# EAGLE board BluePillF4 Teardrops Panel (EAGLE 7.7.0), part 1 of 4
AUTHOR: www.stm32duino.com; REV: A
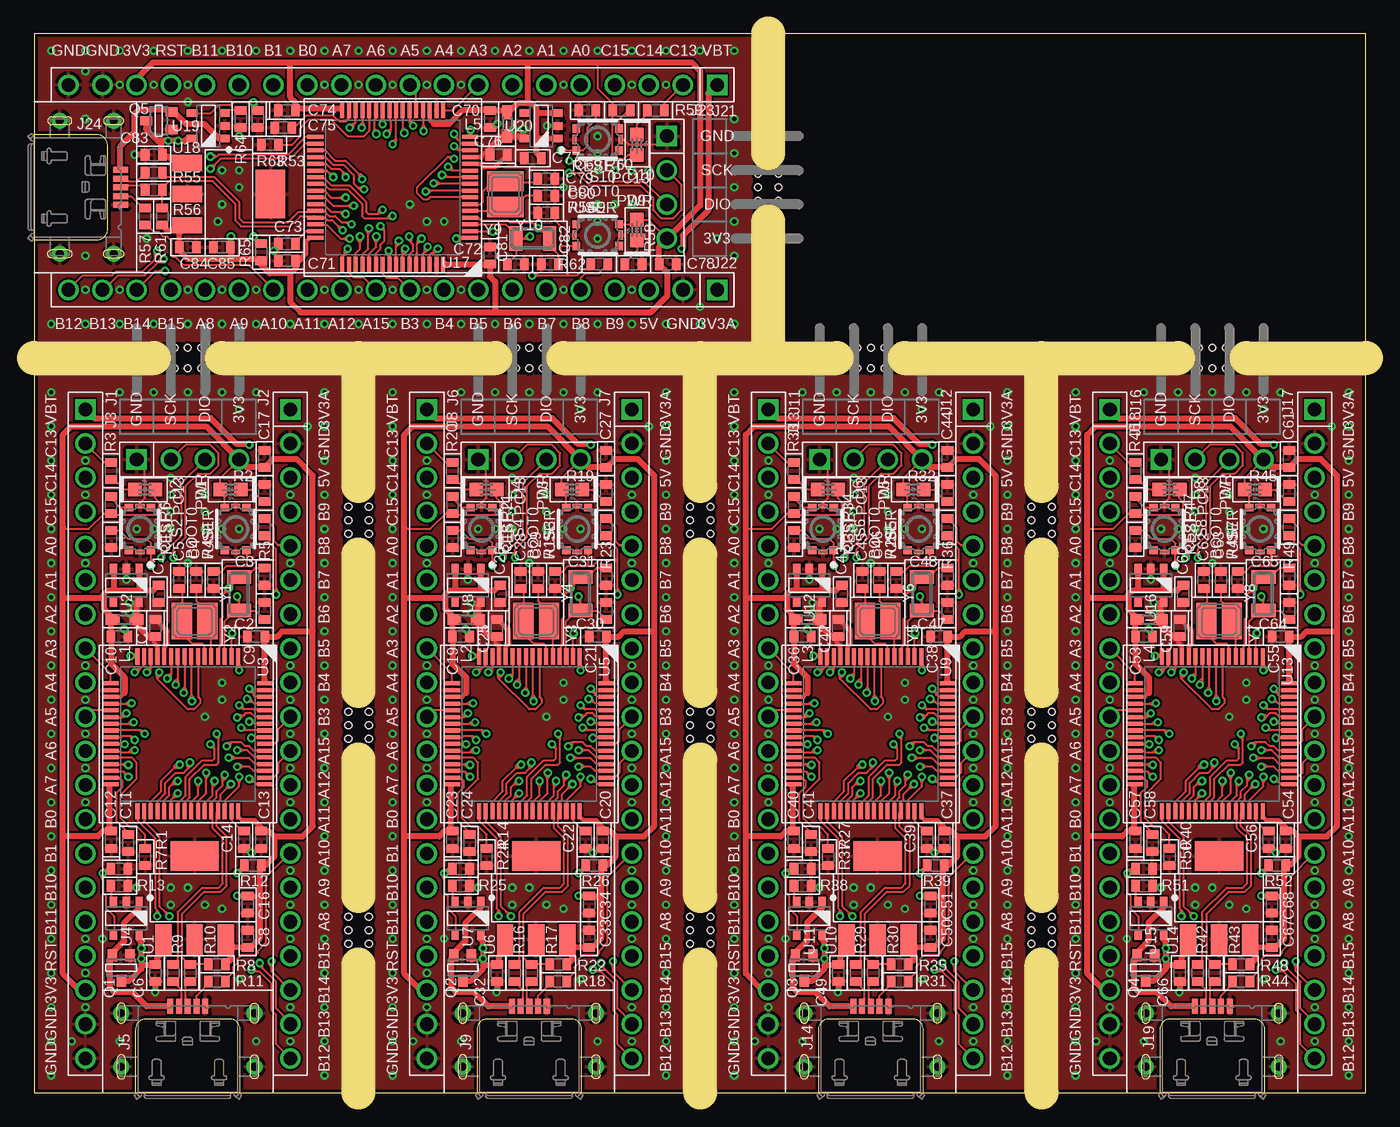
[diagram p0: board, top side]
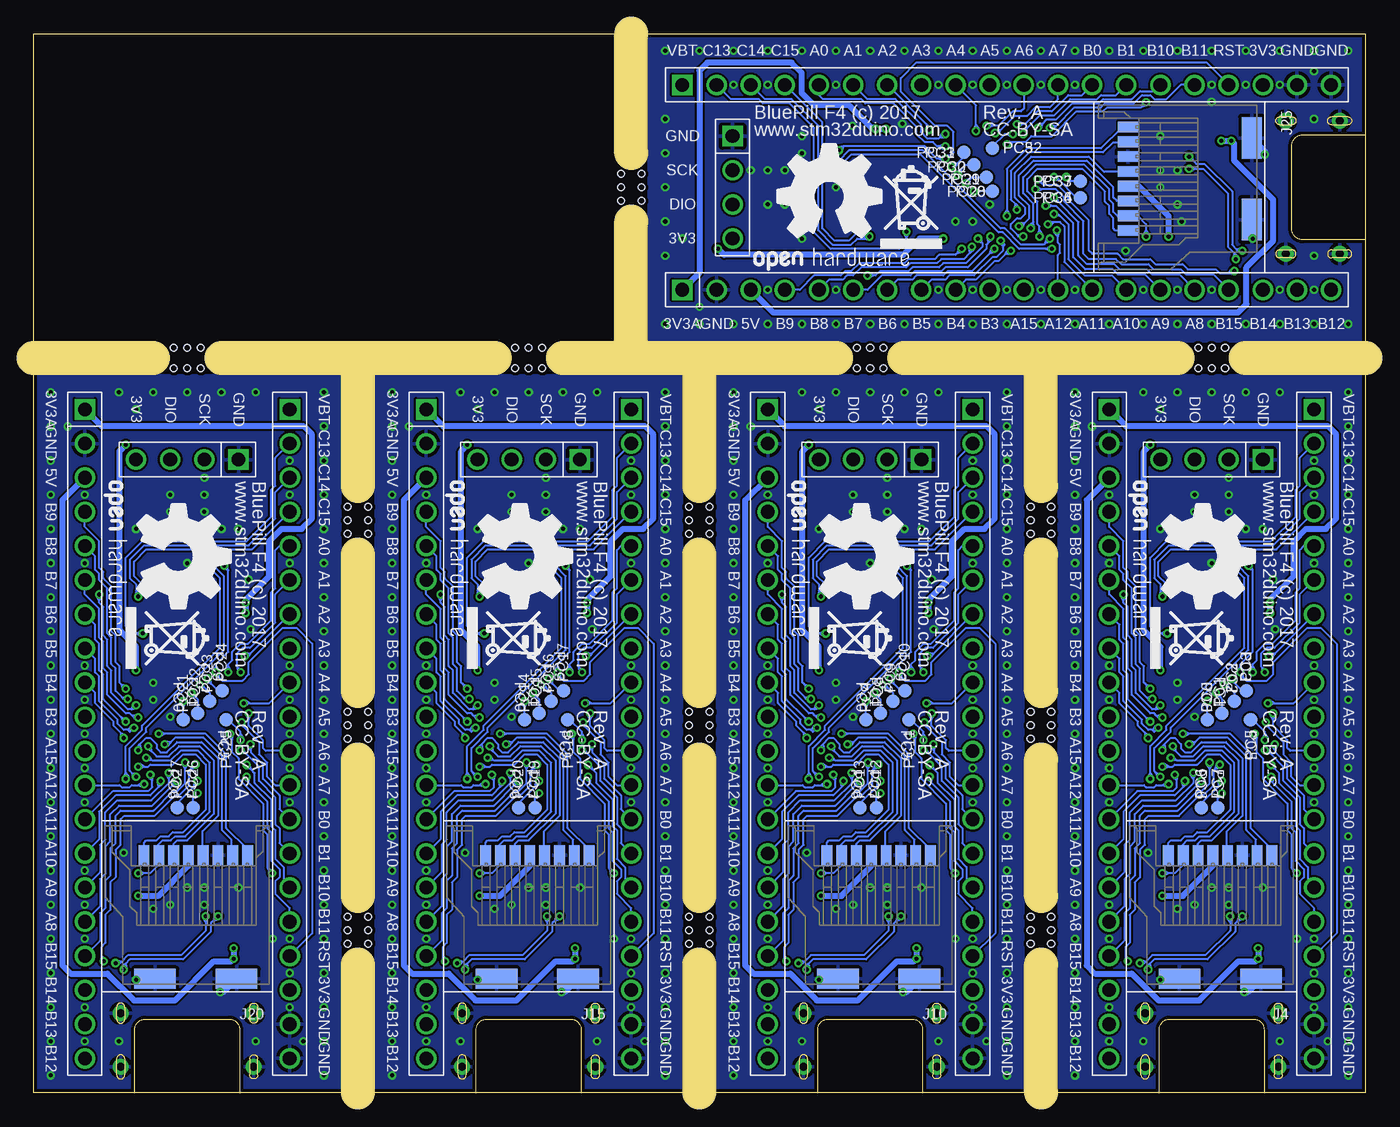
[diagram p1: board, bottom side, seen from below]

Size 99.11 x 78.78 mm. Coordinates in mm from the lower left corner, seen from the top.
Outline: 25.45,0.04 48.3,0.04
Outline: 50.84,0.04 73.7,0.04
Outline: 0.04,78.78 0.04,0.04 99.11,0.04 99.11,78.78 0.04,78.78
Copper layers (1*16): Top 0.035mm / dielectric 1.5mm / Bottom 0.035mm
Design rules "SeeedStudio_2layer_DRU_no_angle_20140221 *": minimum track width 6mil, minimum drill 12mil, track to track 6mil, track to pad 6mil, pad to pad 6mil, via to via 6mil, smd to smd 0mil, copper to edge 10mil, drill to drill 10mil, minimum pad ring 10mil, minimum via ring 6mil, stop-mask expansion 2mil, vias tented up to drill 100mil, thermal gap 10mil
Holes 0.5 mm at 11.47,53.89 12.47,53.89 10.47,53.89 10.47,55.42 11.47,55.42 12.47,55.42 36.88,53.89 37.88,53.89 35.88,53.89 35.88,55.42 36.88,55.42 37.88,55.42 62.27,53.89 63.27,53.89 61.27,53.89 61.27,55.42 62.27,55.42 63.27,55.42 87.67,53.89 88.67,53.89 86.67,53.89 86.67,55.42 87.67,55.42 88.67,55.42 24.94,42.59 24.94,43.59 24.94,41.59 23.41,41.59 23.41,42.59 23.41,43.59 50.34,42.59 50.34,43.59 50.34,41.59 48.81,41.59 48.81,42.59 48.81,43.59 75.74,42.59 75.74,43.59 75.74,41.59 74.21,41.59 74.21,42.59 74.21,43.59 24.94,27.35 24.94,28.35 24.94,26.35 23.41,26.35 23.41,27.35 23.41,28.35 24.94,12.11 24.94,13.11 24.94,11.11 23.41,11.11 23.41,12.11 23.41,13.11 50.34,27.35 50.34,28.35 50.34,26.35 48.81,26.35 48.81,27.35 48.81,28.35 50.34,12.11 50.34,13.11 50.34,11.11 48.81,11.11 48.81,12.11 48.81,13.11 75.74,27.35 75.74,28.35 75.74,26.35 74.21,26.35 74.21,27.35 74.21,28.35 75.74,12.11 75.74,13.11 75.74,11.11 74.21,11.11 74.21,12.11 74.21,13.11 55.42,67.36 55.42,68.36 55.42,66.36 53.89,66.36 53.89,67.36 53.89,68.36
Milling: 23 lines

## Footprints (pad centres in the part's own frame; a part is rotated, then mirrored left to right if it is on the bottom)
C0603 = smd 0.635 x 0.889: 1 -0.635,0; 2 0.635,0
LED0603 = smd 1.016 x 1.016: 1 -0.762,0; 2 0.762,0
MH20-1-0.1 = drill 1.016 square: 1 0,0 | drill 1.016: 2 2.54,0; 3 5.08,0; 4 7.62,0; 5 10.16,0; 6 12.7,0; 7 15.24,0; 8 17.78,0; 9 20.32,0; 10 22.86,0; 11 25.4,0; 12 27.94,0; 13 30.48,0; 14 33.02,0; 15 35.56,0; 16 38.1,0; 17 40.64,0; 18 43.18,0; 19 45.72,0; 20 48.26,0
MH_RA4-1-0.1 = drill 1.016 square: 1 -3.81,-3.81 | drill 1.016: 2 -1.27,-3.81; 3 1.27,-3.81; 4 3.81,-3.81
MR07C-06200 = smd 3.1 x 1.5: G1 3.03,9.2; G2 -3.03,9.2 | smd 0.8 x 1.5: P1 3.85,0; P2 2.75,0; P3 1.65,0; P4 0.55,0; P5 -0.55,0; P6 -1.65,0; P7 -2.75,0; P8 -3.85,0
47662-001 = smd 0.45 x 1.1: 1 -1.3,4.52; 2 -0.65,4.52; 3 0,4.52; 4 0.65,4.52; 5 1.3,4.52 | drill 0.6 pad 1.2: S$1 -4.95,0; S$2 4.95,0; S$3 -4.95,4; S$4 4.95,4
FB0603 = smd 1.016 x 0.762: 1 -0.889,0; 2 0.889,0
TEST_PAD = smd 1 x 1: 1 0,0
SOT323 = smd 0.7 x 0.9: 1 -0.65,-0.95; 2 0.65,-0.95; 3 0,0.95
R0603 = smd 0.635 x 0.889: 1 -0.635,0; 2 0.635,0
SKSGACE010 = smd 0.575 x 0.625: 1 -1.587,0.812; 2 -1.587,-0.812; 3 1.587,0.812; 4 1.587,-0.812 | smd 0.325 x 0.699: 5 -1.712,0; 6 1.712,0
SOT223 = smd 1.219 x 2.235: 1 -2.311,-3.099; 2 0,-3.099; 3 2.311,-3.099 | smd 3.6 x 2.2: PAD 0,3.099
SOT23-5 = smd 0.55 x 0.8: 1 -0.95,-1.2; 2 0,-1.2; 3 0.95,-1.2; 4 0.95,1.2; 5 -0.95,1.2
LQFP64 = smd 1.2 x 0.3: 1 -5.75,3.75; 2 -5.75,3.25; 3 -5.75,2.75; 4 -5.75,2.25; 5 -5.75,1.75; 6 -5.75,1.25; 7 -5.75,0.75; 8 -5.75,0.25; 9 -5.75,-0.25; 10 -5.75,-0.75; 11 -5.75,-1.25; 12 -5.75,-1.75; 13 -5.75,-2.25; 14 -5.75,-2.75; 15 -5.75,-3.25; 16 -5.75,-3.75; 33 5.75,-3.75; 34 5.75,-3.25; 35 5.75,-2.75; 36 5.75,-2.25; 37 5.75,-1.75; 38 5.75,-1.25; 39 5.75,-0.75; 40 5.75,-0.25; 41 5.75,0.25; 42 5.75,0.75; 43 5.75,1.25; 44 5.75,1.75; 45 5.75,2.25; 46 5.75,2.75; 47 5.75,3.25; 48 5.75,3.75 | smd 0.3 x 1.2: 17 -3.75,-5.75; 18 -3.25,-5.75; 19 -2.75,-5.75; 20 -2.25,-5.75; 21 -1.75,-5.75; 22 -1.25,-5.75; 23 -0.75,-5.75; 24 -0.25,-5.75; 25 0.25,-5.75; 26 0.75,-5.75; 27 1.25,-5.75; 28 1.75,-5.75; 29 2.25,-5.75; 30 2.75,-5.75; 31 3.25,-5.75; 32 3.75,-5.75; 49 3.75,5.75; 50 3.25,5.75; 51 2.75,5.75; 52 2.25,5.75; 53 1.75,5.75; 54 1.25,5.75; 55 0.75,5.75; 56 0.25,5.75; 57 -0.25,5.75; 58 -0.75,5.75; 59 -1.25,5.75; 60 -1.75,5.75; 61 -2.25,5.75; 62 -2.75,5.75; 63 -3.25,5.75; 64 -3.75,5.75
CRYSTAL_32X15 = smd 1 x 1.8: 1 -1.25,0; 2 1.25,0
CRYSTAL_32X25_2P = smd 1.5 x 2.7: 1 -0.95,0; 2 0.95,0

## Placement (x,y rotation side)
C1  10u  [C0603]  9.32,37.13 270 top
C2  6p8  [C0603]  17.19,35.86 90 top
C3  6p8  [C0603]  17.19,38.4 270 top
C4  20p  [C0603]  12.11,38.15 90 top
C5  20p  [C0603]  10.84,38.15 90 top
C6  4u7  [C0603]  9.06,8.94 270 top
C7  100n  [C0603]  9.06,34.59 270 top
C8  4u7  [C0603]  15.92,11.47 90 top
C9  100n  [C0603]  16.55,33.95 0 top
C10  100n  [C0603]  6.39,33.95 180 top
C11  2u2  [C0603]  7.03,18.59 90 top
C12  100n  [C0603]  5.76,18.84 270 top
C13  100n  [C0603]  16.94,18.84 270 top
C14  2u2  [C0603]  15.67,18.84 90 top
C15  100n  [C0603]  5.76,41.19 90 top
C16  4u7  [C0603]  15.92,14.02 90 top
C17  100n  [C0603]  17.19,47.16 270 top
C18  100n  [C0603]  31.16,41.19 90 top
C19  100n  [C0603]  31.8,33.95 180 top
C20  100n  [C0603]  42.34,18.84 270 top
C21  100n  [C0603]  41.95,33.95 0 top
C22  2u2  [C0603]  41.07,18.84 90 top
C23  100n  [C0603]  31.16,18.84 270 top
C24  2u2  [C0603]  32.43,18.59 90 top
C25  100n  [C0603]  34.46,34.59 270 top
C26  10u  [C0603]  34.72,37.13 270 top
C27  100n  [C0603]  42.59,47.16 270 top
C28  20p  [C0603]  36.24,38.15 90 top
C29  20p  [C0603]  37.51,38.15 90 top
C30  6p8  [C0603]  42.59,35.86 90 top
C31  6p8  [C0603]  42.59,38.4 270 top
C32  4u7  [C0603]  34.46,8.94 270 top
C33  4u7  [C0603]  41.32,11.47 90 top
C34  4u7  [C0603]  41.32,14.02 90 top
C35  100n  [C0603]  56.56,41.19 90 top
C36  100n  [C0603]  57.2,33.95 180 top
C37  100n  [C0603]  67.74,18.84 270 top
C38  100n  [C0603]  67.36,33.95 0 top
C39  2u2  [C0603]  66.47,18.84 90 top
C40  100n  [C0603]  56.56,18.84 270 top
C41  2u2  [C0603]  57.83,18.59 90 top
C42  100n  [C0603]  59.86,34.59 270 top
C43  10u  [C0603]  60.12,37.13 270 top
C44  100n  [C0603]  67.99,47.16 270 top
C45  20p  [C0603]  61.64,38.15 90 top
C46  20p  [C0603]  62.91,38.15 90 top
C47  6p8  [C0603]  67.99,35.86 90 top
C48  6p8  [C0603]  67.99,38.4 270 top
C49  4u7  [C0603]  59.86,8.94 270 top
C50  4u7  [C0603]  66.72,11.47 90 top
C51  4u7  [C0603]  66.72,14.02 90 top
C52  100n  [C0603]  81.96,41.19 90 top
C53  100n  [C0603]  82.59,33.95 180 top
C54  100n  [C0603]  93.14,18.84 270 top
C55  100n  [C0603]  92.75,33.95 0 top
C56  2u2  [C0603]  91.87,18.84 90 top
C57  100n  [C0603]  81.96,18.84 270 top
C58  2u2  [C0603]  83.23,18.59 90 top
C59  100n  [C0603]  85.26,34.59 270 top
C60  10u  [C0603]  85.52,37.13 270 top
C61  100n  [C0603]  93.39,47.16 270 top
C62  20p  [C0603]  87.04,38.15 90 top
C63  20p  [C0603]  88.31,38.15 90 top
C64  6p8  [C0603]  93.39,35.86 90 top
C65  6p8  [C0603]  93.39,38.4 270 top
C66  4u7  [C0603]  85.26,8.94 270 top
C67  4u7  [C0603]  92.12,11.47 90 top
C68  4u7  [C0603]  92.12,14.02 90 top
C69  100n  [C0603]  41.19,73.07 0 top
C70  100n  [C0603]  33.95,72.44 90 top
C71  100n  [C0603]  18.84,61.89 180 top
C72  100n  [C0603]  33.95,62.27 270 top
C73  2u2  [C0603]  18.84,63.16 0 top
C74  100n  [C0603]  18.84,73.07 180 top
C75  2u2  [C0603]  18.59,71.8 0 top
C76  100n  [C0603]  34.59,69.77 180 top
C77  10u  [C0603]  37.13,69.51 180 top
C78  100n  [C0603]  47.16,61.64 180 top
C79  20p  [C0603]  38.15,67.99 0 top
C80  20p  [C0603]  38.15,66.72 0 top
C81  6p8  [C0603]  35.86,61.64 0 top
C82  6p8  [C0603]  38.4,61.64 180 top
C83  4u7  [C0603]  8.94,69.77 180 top
C84  4u7  [C0603]  11.47,62.91 0 top
C85  4u7  [C0603]  14.02,62.91 0 top
D1  GREEN  [LED0603]  14.65,44.88 180 top
D2  RED  [LED0603]  8.3,44.88 0 top
D3  GREEN  [LED0603]  40.05,44.88 180 top
D4  RED  [LED0603]  33.7,44.88 0 top
D5  GREEN  [LED0603]  65.45,44.88 180 top
D6  RED  [LED0603]  59.1,44.88 0 top
D7  GREEN  [LED0603]  90.85,44.88 180 top
D8  RED  [LED0603]  84.5,44.88 0 top
D9  GREEN  [LED0603]  44.88,64.18 90 top
D10  RED  [LED0603]  44.88,70.53 270 top
DRILEGEND  [DRILEGEND]  127.3,59.99 0 top  (outside the outline)
J1  MH20-1  [MH20-1-0.1]  3.85,50.84 270 top
J2  MH20-1  [MH20-1-0.1]  19.09,50.84 270 top
J3  MH_RA4-1  [MH_RA4-1-0.1]  11.47,50.92 0 top
J4  MR07C-06200  [MR07C-06200]  10.84,17.7 180 bottom
J5  47642-001  [47662-001]  11.47,1.95 0 top
J6  MH20-1  [MH20-1-0.1]  29.26,50.84 270 top
J7  MH20-1  [MH20-1-0.1]  44.5,50.84 270 top
J8  MH_RA4-1  [MH_RA4-1-0.1]  36.88,50.92 0 top
J9  47642-001  [47662-001]  36.88,1.95 0 top
J10  MR07C-06200  [MR07C-06200]  36.24,17.7 180 bottom
J11  MH20-1  [MH20-1-0.1]  54.66,50.84 270 top
J12  MH20-1  [MH20-1-0.1]  69.89,50.84 270 top
J13  MH_RA4-1  [MH_RA4-1-0.1]  62.27,50.92 0 top
J14  47642-001  [47662-001]  62.27,1.95 0 top
J15  MR07C-06200  [MR07C-06200]  61.64,17.7 180 bottom
J16  MH20-1  [MH20-1-0.1]  80.06,50.84 270 top
J17  MH20-1  [MH20-1-0.1]  95.3,50.84 270 top
J18  MH_RA4-1  [MH_RA4-1-0.1]  87.67,50.92 0 top
J19  47642-001  [47662-001]  87.67,1.95 0 top
J20  MR07C-06200  [MR07C-06200]  87.04,17.7 180 bottom
J21  MH20-1  [MH20-1-0.1]  50.84,74.98 180 top
J22  MH20-1  [MH20-1-0.1]  50.84,59.73 180 top
J23  MH_RA4-1  [MH_RA4-1-0.1]  50.92,67.36 270 top
J24  47642-001  [47662-001]  1.95,67.36 270 top
J25  MR07C-06200  [MR07C-06200]  17.7,67.99 270 bottom
L1  FBMH1608HM471-T  [FB0603]  6.78,35.22 0 top
L2  FBMH1608HM471-T  [FB0603]  32.18,35.22 0 top
L3  FBMH1608HM471-T  [FB0603]  57.58,35.22 0 top
L4  FBMH1608HM471-T  [FB0603]  82.98,35.22 0 top
L5  FBMH1608HM471-T  [FB0603]  35.22,72.05 270 top
LOGO1  CC-BY-SA_LOGO  [CC-BY-SA_LOGO]  40.69,-20.27 0 top  (outside the outline)
PC0  TEST_PAD  [TEST_PAD]  11.78,27.78 90 bottom
PC1  TEST_PAD  [TEST_PAD]  10.71,28.24 90 bottom
PC2  TEST_PAD  [TEST_PAD]  9.8,29.15 90 bottom
PC3  TEST_PAD  [TEST_PAD]  8.88,29.92 90 bottom
PC4  TEST_PAD  [TEST_PAD]  37.18,27.78 90 bottom
PC5  TEST_PAD  [TEST_PAD]  8.58,27.78 270 bottom
PC6  TEST_PAD  [TEST_PAD]  12.24,21.23 270 bottom
PC7  TEST_PAD  [TEST_PAD]  11.02,21.23 270 bottom
PC8  TEST_PAD  [TEST_PAD]  36.11,28.24 90 bottom
PC9  TEST_PAD  [TEST_PAD]  35.2,29.15 90 bottom
PC10  TEST_PAD  [TEST_PAD]  34.28,29.92 90 bottom
PC11  TEST_PAD  [TEST_PAD]  33.98,27.78 270 bottom
PC12  TEST_PAD  [TEST_PAD]  36.42,21.23 270 bottom
PC13  TEST_PAD  [TEST_PAD]  37.64,21.23 270 bottom
PC14  TEST_PAD  [TEST_PAD]  62.58,27.78 90 bottom
PC15  TEST_PAD  [TEST_PAD]  61.51,28.24 90 bottom
PC16  TEST_PAD  [TEST_PAD]  60.6,29.15 90 bottom
PC17  TEST_PAD  [TEST_PAD]  59.68,29.92 90 bottom
PC18  TEST_PAD  [TEST_PAD]  59.38,27.78 270 bottom
PC19  TEST_PAD  [TEST_PAD]  61.82,21.23 270 bottom
PC20  TEST_PAD  [TEST_PAD]  63.04,21.23 270 bottom
PC21  TEST_PAD  [TEST_PAD]  87.98,27.78 90 bottom
PC22  TEST_PAD  [TEST_PAD]  86.91,28.24 90 bottom
PC23  TEST_PAD  [TEST_PAD]  86,29.15 90 bottom
PC24  TEST_PAD  [TEST_PAD]  85.08,29.92 90 bottom
PC25  TEST_PAD  [TEST_PAD]  84.78,27.78 270 bottom
PC26  TEST_PAD  [TEST_PAD]  87.22,21.23 270 bottom
PC27  TEST_PAD  [TEST_PAD]  88.44,21.23 270 bottom
PC28  TEST_PAD  [TEST_PAD]  27.78,67.05 180 bottom
PC29  TEST_PAD  [TEST_PAD]  28.24,68.12 180 bottom
PC30  TEST_PAD  [TEST_PAD]  29.15,69.03 180 bottom
PC31  TEST_PAD  [TEST_PAD]  29.92,69.95 180 bottom
PC32  TEST_PAD  [TEST_PAD]  27.78,70.25 0 bottom
PC33  TEST_PAD  [TEST_PAD]  21.23,67.81 0 bottom
PC34  TEST_PAD  [TEST_PAD]  21.23,66.59 0 bottom
Q1  DMP2160UW-7  [SOT323]  6.52,9.32 180 top
Q2  DMP2160UW-7  [SOT323]  31.92,9.32 180 top
Q3  DMP2160UW-7  [SOT323]  57.32,9.32 180 top
Q4  DMP2160UW-7  [SOT323]  82.72,9.32 180 top
Q5  DMP2160UW-7  [SOT323]  9.32,72.31 90 top
R1  100k  [R0603]  8.3,17.57 270 top
R2  510R  [R0603]  17.19,44.62 270 top
R3  510R  [R0603]  5.76,46.27 270 top
R4  100k  [R0603]  13.38,38.15 270 top
R5  0R  [R0603]  17.19,42.08 270 top
R6  10k  [R0603]  5.76,43.73 90 top
R7  100k  [R0603]  6.39,16.68 0 top
R8  1k5  [R0603]  13.63,9.57 180 top
R9  22R  [R0603]  10.38,8.94 90 top
R10  22R  [R0603]  11.65,8.94 90 top
R11  1k  [R0603]  13.63,8.3 0 top
R12  100k  [R0603]  16.3,16.94 0 top
R13  10k  [R0603]  6.39,15.41 0 top
R14  100k  [R0603]  33.7,17.57 270 top
R15  100k  [R0603]  38.78,38.15 270 top
R16  22R  [R0603]  35.78,8.94 90 top
R17  22R  [R0603]  37.05,8.94 90 top
R18  1k  [R0603]  39.03,8.3 0 top
R19  510R  [R0603]  42.59,44.62 270 top
R20  510R  [R0603]  31.16,46.27 270 top
R21  10k  [R0603]  31.16,43.73 90 top
R22  1k5  [R0603]  39.03,9.57 180 top
R23  0R  [R0603]  42.59,42.08 270 top
R24  100k  [R0603]  31.8,16.68 0 top
R25  10k  [R0603]  31.8,15.41 0 top
R26  100k  [R0603]  41.7,16.94 0 top
R27  100k  [R0603]  59.1,17.57 270 top
R28  100k  [R0603]  64.18,38.15 270 top
R29  22R  [R0603]  61.18,8.94 90 top
R30  22R  [R0603]  62.45,8.94 90 top
R31  1k  [R0603]  64.43,8.3 0 top
R32  510R  [R0603]  67.99,44.62 270 top
R33  510R  [R0603]  56.56,46.27 270 top
R34  10k  [R0603]  56.56,43.73 90 top
R35  1k5  [R0603]  64.43,9.57 180 top
R36  0R  [R0603]  67.99,42.08 270 top
R37  100k  [R0603]  57.2,16.68 0 top
R38  10k  [R0603]  57.2,15.41 0 top
R39  100k  [R0603]  67.1,16.94 0 top
R40  100k  [R0603]  84.5,17.57 270 top
R41  100k  [R0603]  89.58,38.15 270 top
R42  22R  [R0603]  86.58,8.94 90 top
R43  22R  [R0603]  87.85,8.94 90 top
R44  1k  [R0603]  89.83,8.3 0 top
R45  510R  [R0603]  93.39,44.62 270 top
R46  510R  [R0603]  81.96,46.27 270 top
R47  10k  [R0603]  81.96,43.73 90 top
R48  1k5  [R0603]  89.83,9.57 180 top
R49  0R  [R0603]  93.39,42.08 270 top
R50  100k  [R0603]  82.59,16.68 0 top
R51  10k  [R0603]  82.59,15.41 0 top
R52  100k  [R0603]  92.5,16.94 0 top
R53  100k  [R0603]  17.57,70.53 180 top
R54  100k  [R0603]  38.15,65.45 180 top
R55  22R  [R0603]  8.94,68.45 0 top
R56  22R  [R0603]  8.94,67.18 0 top
R57  1k  [R0603]  8.3,65.2 270 top
R58  510R  [R0603]  44.62,61.64 180 top
R59  510R  [R0603]  46.27,73.07 180 top
R60  10k  [R0603]  43.73,73.07 0 top
R61  1k5  [R0603]  9.57,65.2 90 top
R62  0R  [R0603]  42.08,61.64 180 top
R63  100k  [R0603]  16.68,72.44 270 top
R64  10k  [R0603]  15.41,72.44 270 top
R65  100k  [R0603]  16.94,62.53 270 top
S1  SKSGACE010  [SKSGACE010]  15.03,41.95 90 top
S2  SKSGACE010  [SKSGACE010]  7.92,41.95 90 top
S3  SKSGACE010  [SKSGACE010]  40.43,41.95 90 top
S4  SKSGACE010  [SKSGACE010]  33.32,41.95 90 top
S5  SKSGACE010  [SKSGACE010]  65.83,41.95 90 top
S6  SKSGACE010  [SKSGACE010]  58.72,41.95 90 top
S7  SKSGACE010  [SKSGACE010]  91.23,41.95 90 top
S8  SKSGACE010  [SKSGACE010]  84.12,41.95 90 top
S9  SKSGACE010  [SKSGACE010]  41.95,63.8 0 top
S10  SKSGACE010  [SKSGACE010]  41.95,70.91 0 top
U1  AP2114HA-3.3TRG1  [SOT223]  11.98,14.52 0 top
U2  AP2112K3.3-TRG1  [SOT23-5]  6.9,37.76 180 top
U3  STM32F405RGT6  [LQFP64]  11.47,26.72 270 top
U4  SY6280  [SOT23-5]  6.9,13 180 top
U5  STM32F405RGT6  [LQFP64]  36.88,26.72 270 top
U6  AP2114HA-3.3TRG1  [SOT223]  37.38,14.52 0 top
U7  SY6280  [SOT23-5]  32.3,13 180 top
U8  AP2112K3.3-TRG1  [SOT23-5]  32.3,37.76 180 top
U9  STM32F405RGT6  [LQFP64]  62.27,26.72 270 top
U10  AP2114HA-3.3TRG1  [SOT223]  62.78,14.52 0 top
U11  SY6280  [SOT23-5]  57.7,13 180 top
U12  AP2112K3.3-TRG1  [SOT23-5]  57.7,37.76 180 top
U13  STM32F405RGT6  [LQFP64]  87.67,26.72 270 top
U14  AP2114HA-3.3TRG1  [SOT223]  88.18,14.52 0 top
U15  SY6280  [SOT23-5]  83.1,13 180 top
U16  AP2112K3.3-TRG1  [SOT23-5]  83.1,37.76 180 top
U17  STM32F405RGT6  [LQFP64]  26.72,67.36 180 top
U18  AP2114HA-3.3TRG1  [SOT223]  14.52,66.85 270 top
U19  SY6280  [SOT23-5]  13,71.93 90 top
U20  AP2112K3.3-TRG1  [SOT23-5]  37.76,71.93 90 top
U$1  [OPEN_HARDWARE_LOGO]  37.64,39.92 270 bottom
U$2  [A5L-LOC]  -10.12,-30.44 0 top  (outside the outline)
U$3  [RECYCLE_BIN_LOGO]  41.45,36.11 270 bottom
U$4  [OPEN_HARDWARE_LOGO]  12.24,39.92 270 bottom
U$5  [OPEN_HARDWARE_LOGO]  63.04,39.92 270 bottom
U$6  [RECYCLE_BIN_LOGO]  16.05,36.11 270 bottom
U$7  [RECYCLE_BIN_LOGO]  66.85,36.11 270 bottom
U$8  [OPEN_HARDWARE_LOGO]  88.44,39.92 270 bottom
U$9  [RECYCLE_BIN_LOGO]  92.25,36.11 270 bottom
U$10  [OPEN_HARDWARE_LOGO]  39.92,66.59 0 bottom
U$11  [RECYCLE_BIN_LOGO]  36.11,62.78 0 bottom
Y1  FC-135  [CRYSTAL_32X15]  15.29,37.13 270 top
Y2  NX3225GD  [CRYSTAL_32X25_2P]  11.98,35.1 0 top
Y3  NX3225GD  [CRYSTAL_32X25_2P]  37.38,35.1 0 top
Y4  FC-135  [CRYSTAL_32X15]  40.69,37.13 270 top
Y5  NX3225GD  [CRYSTAL_32X25_2P]  62.78,35.1 0 top
Y6  FC-135  [CRYSTAL_32X15]  66.09,37.13 270 top
Y7  NX3225GD  [CRYSTAL_32X25_2P]  88.18,35.1 0 top
Y8  FC-135  [CRYSTAL_32X15]  91.48,37.13 270 top
Y9  NX3225GD  [CRYSTAL_32X25_2P]  35.1,66.85 270 top
Y10  FC-135  [CRYSTAL_32X15]  37.13,63.55 180 top

## Library data of the parts
C1 C26 C43 C60 C77 = BluePillF4; PARTNO: C0603_10u_X7R_10%_CER_50V; SIZE: 0603; TC: X7R; TOL: ±10%; TYPE: CER; VOLT: 6.3V
C2 C3 C30 C31 C47 C48 C64 C65 C81 C82 = BluePillF4; PARTNO: C0603_6p8_NP0_5%_CER_50V; SIZE: 0603; TC: NP0; TOL: ±5%; TYPE: CER; VOLT: 50V
C4 C5 C28 C29 C45 C46 C62 C63 C79 C80 = BluePillF4; PARTNO: C0603_20p_NP0_5%_CER_50V; SIZE: 0603; TC: NP0; TOL: ±5%; TYPE: CER; VOLT: 50V
C6 C8 C16 C32-C34 C49-C51 C66-C68 C83-C85 = BluePillF4; PARTNO: C0603_4u7_X7R_10%_CER_50V; SIZE: 0603; TC: X7R; TOL: ±10%; TYPE: CER; VOLT: 6.3V
C7 C9 C10 C12 C13 C15 C17-C21 C23 C25 C27 C35-C38 C40 C42 C44 C52-C55 C57 C59 C61 C69-C72 C74 C76 C78 = BluePillF4; PARTNO: C0603_100n_X7R_10%_CER_50V; SIZE: 0603; TC: X7R; TOL: ±10%; TYPE: CER; VOLT: 50V
C11 C14 C22 C24 C39 C41 C56 C58 C73 C75 = BluePillF4; PARTNO: C0603_2u2_X7R_10%_CER_50V; SIZE: 0603; TC: X7R; TOL: ±10%; TYPE: CER; VOLT: 6.3V
D1 D3 D5 D7 D9 = BluePillF4; PARTNO: LED0603-GREEN
D2 D4 D6 D8 D10 = BluePillF4; PARTNO: LED0603-RED
DRILEGEND = drilegend
J1 J2 J6 J7 J11 J12 J16 J17 J21 J22 = BluePillF4; PARTNO: MH20-1-0.1
J3 J8 J13 J18 J23 = BluePillF4; PARTNO: MH_RA4-1-0.1
J4 J10 J15 J20 J25 = BluePillF4; HEIGHT: 1.9mm; PARTNO: MR07C-06200
J5 J9 J14 J19 J24 = BluePillF4; HEIGHT: 1.52mm; PARTNO: 47642-0001
L1-L5 = BluePillF4; PARTNO: FBMH1608HM471-T; RATE: 1A; SIZE: 0603
LOGO1 PC0 PC1-PC34 = BluePillF4; BOM: EXCLUDE
Q1-Q5 = BluePillF4; HEIGHT: 1.0mm; PARTNO: DMP2160UW-7
R1 R4 R7 R12 R14 R15 R24 R26-R28 R37 R39-R41 R50 R52-R54 R63 R65 = BluePillF4; PARTNO: R0603_100k_5%_125mW; RATE: 125mW; SIZE: 0603; TOL: 5%
R2 R3 R5 R19 R20 R23 R32 R33 R36 R45 R46 R49 R58 R59 R62 = BluePillF4; PARTNO: R0603_510R_5%_125mW; RATE: 125mW; SIZE: 0603; TOL: 5%
R6 R13 R21 R25 R34 R38 R47 R51 R60 R64 = BluePillF4; PARTNO: R0603_10k_5%_125mW; RATE: 125mW; SIZE: 0603; TOL: 5%
R8 R22 R35 R48 R61 = BluePillF4; DNP: T; PARTNO: R0603_1k5_5%_125mW; RATE: 125mW; SIZE: 0603; TOL: 5%
R9 R10 R16 R17 R29 R30 R42 R43 R55 R56 = BluePillF4; PARTNO: R0603_22R_5%_125mW; RATE: 125mW; SIZE: 0603; TOL: 5%
R11 R18 R31 R44 R57 = BluePillF4; PARTNO: R0603_1k_5%_125mW; RATE: 125mW; SIZE: 0603; TOL: 5%
S1-S10 = BluePillF4; HEIGHT: 1.4mm; PARTNO: SKSGACE010
U1 U6 U10 U14 U18 = BluePillF4; HEIGHT: 1.7mm; PARTNO: AP2114HA3.3-TRG1; RATE: 1A; VOLT: 3.3V
U2 U8 U12 U16 U20 = BluePillF4; DNP: T; HEIGHT: 1.3mm; PARTNO: AP2112?K3.3-TRG1; RATE: 1A; VOLT: 3.3V
U3 U5 U9 U13 U17 = BluePillF4; HEIGHT: 1.6mm; PARTNO: STM32F405RGT6
U4 U7 U11 U15 U19 = BluePillF4; HEIGHT: 1.3mm; PARTNO: SY6280AAC
U$1-U$11 = BluePillF4
Y1 Y4 Y6 Y8 Y10 = BluePillF4; CAP: 12.5pF; FREQ: 32.768KhZ; PARTNO: FC-135 32.7680KA-A5; TOL: ±20ppm
Y2 Y3 Y5 Y7 Y9 = BluePillF4; CAP: 8pF; FREQ: 8MHz; PARTNO: NX3225GD-8MHZ-STD-CRA-3; TOL: ±50ppm

## Nets
+3V1: C19.2 C20.1 C21.2 C23.1 C26.1 C27.2 C33.1 C34.2 D3.2 D4.2 J6.18 J8.4 J10.P4 L2.1 R21.1 R22.1 R26.2 S3.3 U5.19 U5.32 U5.48 U5.64 U6.3 U8.1 U8.3
+3V2: C36.2 C37.1 C38.2 C40.1 C43.1 C44.2 C50.1 C51.2 D5.2 D6.2 J11.18 J13.4 J15.P4 L3.1 R34.1 R35.1 R39.2 S5.3 U9.19 U9.32 U9.48 U9.64 U10.3 U12.1 U12.3
+3V3: C1.1 C8.1 C9.2 C10.2 C12.1 C13.1 C16.2 C17.2 D1.2 D2.2 J1.18 J3.4 J4.P4 L1.1 R6.1 R8.1 R12.2 S1.3 U1.3 U2.1 U2.3 U3.19 U3.32 U3.48 U3.64
+3V3A: C7.2 J2.1 L1.2 U2.5 U3.13
+3V3A1: C25.2 J7.1 L2.2 U5.13 U8.5
+3V3A2: C42.2 J12.1 L3.2 U9.13 U12.5
+3V3A3: C59.2 J17.1 L4.2 U13.13 U16.5
+3V3A4: C76.2 J22.1 L5.2 U17.13 U20.5
+3V4: C53.2 C54.1 C55.2 C57.1 C60.1 C61.2 C67.1 C68.2 D7.2 D8.2 J16.18 J18.4 J20.P4 L4.1 R47.1 R48.1 R52.2 S7.3 U13.19 U13.32 U13.48 U13.64 U14.3 U16.1 U16.3
+3V5: C70.2 C71.1 C72.2 C74.1 C77.1 C78.2 C84.1 C85.2 D9.2 D10.2 J21.18 J23.4 J25.P4 L5.1 R60.1 R61.1 R65.2 S9.3 U17.19 U17.32 U17.48 U17.64 U18.3 U20.1 U20.3
+5V: C6.1 J2.3 Q1.3 U1.1 U4.5
+5V1: C32.1 J7.3 Q2.3 U6.1 U7.5
+5V2: C49.1 J12.3 Q3.3 U10.1 U11.5
+5V3: C66.1 J17.3 Q4.3 U14.1 U15.5
+5V4: C83.1 J22.3 Q5.3 U18.1 U19.5
AGND: C1.2 C7.1 U3.12
AGND1: C25.1 C26.2 U5.12
AGND2: C42.1 C43.2 U9.12
AGND3: C59.1 C60.2 U13.12
AGND4: C76.1 C77.2 U17.12
BOOT0: R4.1 R5.2 S1.2 U3.60
BOOT1: R15.1 R23.2 S3.2 U5.60
BOOT2: R28.1 R36.2 S5.2 U9.60
BOOT3: R41.1 R49.2 S7.2 U13.60
BOOT4: R54.1 R62.2 S9.2 U17.60
D1: D1.1 R2.2
D2: D2.1 R3.2
D3: D3.1 R19.2
D4: D4.1 R20.2
D5: D5.1 R32.2
D6: D6.1 R33.2
D7: D7.1 R45.2
D8: D8.1 R46.2
D9: D9.1 R58.2
D10: D10.1 R59.2
DM: J5.2 R9.1
DM1: J9.2 R16.1
DM2: J14.2 R29.1
DM3: J19.2 R42.1
DM4: J24.2 R55.1
DP: J5.3 R10.1
DP1: J9.3 R17.1
DP2: J14.3 R30.1
DP3: J19.3 R43.1
DP4: J24.3 R56.1
GND: C2.2 C3.2 C4.2 C5.2 C6.2 C8.2 C9.1 C10.1 C11.1 C12.2 C13.2 C14.1 C15.1 C16.1 C17.1 J1.19 J1.20 J2.2 J3.1 J4.G1 J4.G2 J4.P6 J5.5 J5.S$1 J5.S$2 J5.S$3 J5.S$4 Q1.1 R1.2 R2.1 R4.2 R7.2 R13.2 S1.5 S1.6 S2.5 S2.6 U1.2 U1.PAD U2.2 U3.18 U3.63 U4.2
GND1: C18.1 C19.1 C20.2 C21.1 C22.1 C23.2 C24.1 C27.1 C28.2 C29.2 C30.2 C31.2 C32.2 C33.2 C34.1 J6.19 J6.20 J7.2 J8.1 J9.5 J9.S$1 J9.S$2 J9.S$3 J9.S$4 J10.G1 J10.G2 J10.P6 Q2.1 R14.2 R15.2 R19.1 R24.2 R25.2 S3.5 S3.6 S4.5 S4.6 U5.18 U5.63 U6.2 U6.PAD U7.2 U8.2
GND2: C35.1 C36.1 C37.2 C38.1 C39.1 C40.2 C41.1 C44.1 C45.2 C46.2 C47.2 C48.2 C49.2 C50.2 C51.1 J11.19 J11.20 J12.2 J13.1 J14.5 J14.S$1 J14.S$2 J14.S$3 J14.S$4 J15.G1 J15.G2 J15.P6 Q3.1 R27.2 R28.2 R32.1 R37.2 R38.2 S5.5 S5.6 S6.5 S6.6 U9.18 U9.63 U10.2 U10.PAD U11.2 U12.2
GND3: C52.1 C53.1 C54.2 C55.1 C56.1 C57.2 C58.1 C61.1 C62.2 C63.2 C64.2 C65.2 C66.2 C67.2 C68.1 J16.19 J16.20 J17.2 J18.1 J19.5 J19.S$1 J19.S$2 J19.S$3 J19.S$4 J20.G1 J20.G2 J20.P6 Q4.1 R40.2 R41.2 R45.1 R50.2 R51.2 S7.5 S7.6 S8.5 S8.6 U13.18 U13.63 U14.2 U14.PAD U15.2 U16.2
GND4: C69.1 C70.1 C71.2 C72.1 C73.1 C74.2 C75.1 C78.1 C79.2 C80.2 C81.2 C82.2 C83.2 C84.2 C85.1 J21.19 J21.20 J22.2 J23.1 J24.5 J24.S$1 J24.S$2 J24.S$3 J24.S$4 J25.G1 J25.G2 J25.P6 Q5.1 R53.2 R54.2 R58.1 R63.2 R64.2 S9.5 S9.6 S10.5 S10.6 U17.18 U17.63 U18.2 U18.PAD U19.2 U20.2
ID: J5.4 R11.1
ID1: J9.4 R18.1
ID2: J14.4 R31.1
ID3: J19.4 R44.1
ID4: J24.4 R57.1
ISET: R13.1 U4.3
ISET1: R25.1 U7.3
ISET2: R38.1 U11.3
ISET3: R51.1 U15.3
ISET4: R64.1 U19.3
NRST: C15.2 J1.17 S2.2 U3.7
NRST1: C18.2 J6.17 S4.2 U5.7
NRST2: C35.2 J11.17 S6.2 U9.7
NRST3: C52.2 J16.17 S8.2 U13.7
NRST4: C69.2 J21.17 S10.2 U17.7
OSCIN: C4.1 U3.5 Y2.2
OSCIN1: C29.1 U5.5 Y3.2
OSCIN2: C46.1 U9.5 Y5.2
OSCIN3: C63.1 U13.5 Y7.2
OSCIN4: C80.1 U17.5 Y9.2
OSCOUT: C5.1 U3.6 Y2.1
OSCOUT1: C28.1 U5.6 Y3.1
OSCOUT2: C45.1 U9.6 Y5.1
OSCOUT3: C62.1 U13.6 Y7.1
OSCOUT4: C79.1 U17.6 Y9.1
PA0: J1.5 U3.14
PA1: J1.6 U3.15
PA2: J1.7 U3.16
PA3: J1.8 U3.17
PA4: J1.9 U3.20
PA5: J1.10 U3.21
PA6: J1.11 U3.22
PA7: J1.12 U3.23
PA8: J2.16 U3.41
PA9: J2.15 U3.42
PA10: J2.14 R11.2 U3.43
PA11: J2.13 R9.2 U3.44
PA12: J2.12 R8.2 R10.2 U3.45
PA13: J3.3 U3.46
PA14: J3.2 U3.49
PA15: J2.11 U3.50
PA16: J6.5 U5.14
PA17: J6.6 U5.15
PA18: J6.7 U5.16
PA19: J6.8 U5.17
PA20: J6.9 U5.20
PA21: J6.10 U5.21
PA22: J6.11 U5.22
PA23: J6.12 U5.23
PA24: J8.3 U5.46
PA25: J7.12 R17.2 R22.2 U5.45
PA26: J7.13 R16.2 U5.44
PA27: J7.14 R18.2 U5.43
PA28: J7.15 U5.42
PA29: J7.16 U5.41
PA30: J7.11 U5.50
PA31: J8.2 U5.49
PA32: J11.5 U9.14
PA33: J11.6 U9.15
PA34: J11.7 U9.16
PA35: J11.8 U9.17
PA36: J11.9 U9.20
PA37: J11.10 U9.21
PA38: J11.11 U9.22
PA39: J11.12 U9.23
PA40: J13.3 U9.46
PA41: J12.12 R30.2 R35.2 U9.45
PA42: J12.13 R29.2 U9.44
PA43: J12.14 R31.2 U9.43
PA44: J12.15 U9.42
PA45: J12.16 U9.41
PA46: J12.11 U9.50
PA47: J13.2 U9.49
PA48: J16.5 U13.14
PA49: J16.6 U13.15
PA50: J16.7 U13.16
PA51: J16.8 U13.17
PA52: J16.9 U13.20
PA53: J16.10 U13.21
PA54: J16.11 U13.22
PA55: J16.12 U13.23
PA56: J18.3 U13.46
PA57: J17.12 R43.2 R48.2 U13.45
PA58: J17.13 R42.2 U13.44
PA59: J17.14 R44.2 U13.43
PA60: J17.15 U13.42
PA61: J17.16 U13.41
PA62: J17.11 U13.50
PA63: J18.2 U13.49
PA64: J21.5 U17.14
PA65: J21.6 U17.15
PA66: J21.7 U17.16
PA67: J21.8 U17.17
PA68: J21.9 U17.20
PA69: J21.10 U17.21
PA70: J21.11 U17.22
PA71: J21.12 U17.23
PA72: J23.3 U17.46
PA73: J22.12 R56.2 R61.2 U17.45
PA74: J22.13 R55.2 U17.44
PA75: J22.14 R57.2 U17.43
PA76: J22.15 U17.42
PA77: J22.16 U17.41
PA78: J22.11 U17.50
PA79: J23.2 U17.49
PB0: J1.13 U3.26
PB1: J1.14 U3.27
PB2: R1.1 U3.28
PB3: J2.10 U3.55
PB4: J2.9 U3.56
PB5: J2.8 U3.57
PB6: J2.7 U3.58
PB7: J2.6 U3.59
PB8: J2.5 R5.1 U3.61
PB9: J2.4 U3.62
PB10: J1.15 U3.29
PB11: J1.16 U3.30
PB12: J2.20 U3.33
PB13: J2.19 U3.34
PB14: J2.18 U3.35
PB15: J2.17 U3.36
PB16: J6.13 U5.26
PB17: J6.14 U5.27
PB18: R14.1 U5.28
PB19: J6.15 U5.29
PB20: J6.16 U5.30
PB21: J7.17 U5.36
PB22: J7.18 U5.35
PB23: J7.19 U5.34
PB24: J7.20 U5.33
PB25: J7.4 U5.62
PB26: J7.5 R23.1 U5.61
PB27: J7.6 U5.59
PB28: J7.7 U5.58
PB29: J7.8 U5.57
PB30: J7.9 U5.56
PB31: J7.10 U5.55
PB32: J11.13 U9.26
PB33: J11.14 U9.27
PB34: R27.1 U9.28
PB35: J11.15 U9.29
PB36: J11.16 U9.30
PB37: J12.17 U9.36
PB38: J12.18 U9.35
PB39: J12.19 U9.34
PB40: J12.20 U9.33
PB41: J12.4 U9.62
PB42: J12.5 R36.1 U9.61
PB43: J12.6 U9.59
PB44: J12.7 U9.58
PB45: J12.8 U9.57
PB46: J12.9 U9.56
PB47: J12.10 U9.55
PB48: J16.13 U13.26
PB49: J16.14 U13.27
PB50: R40.1 U13.28
PB51: J16.15 U13.29
PB52: J16.16 U13.30
PB53: J17.17 U13.36
PB54: J17.18 U13.35
PB55: J17.19 U13.34
PB56: J17.20 U13.33
PB57: J17.4 U13.62
PB58: J17.5 R49.1 U13.61
PB59: J17.6 U13.59
PB60: J17.7 U13.58
PB61: J17.8 U13.57
PB62: J17.9 U13.56
PB63: J17.10 U13.55
PB64: J21.13 U17.26
PB65: J21.14 U17.27
PB66: R53.1 U17.28
PB67: J21.15 U17.29
PB68: J21.16 U17.30
PB69: J22.17 U17.36
PB70: J22.18 U17.35
PB71: J22.19 U17.34
PB72: J22.20 U17.33
PB73: J22.4 U17.62
PB74: J22.5 R62.1 U17.61
PB75: J22.6 U17.59
PB76: J22.7 U17.58
PB77: J22.8 U17.57
PB78: J22.9 U17.56
PB79: J22.10 U17.55
PC0: PC0.1 U3.8
PC1: PC1.1 U3.9
PC2: PC2.1 U3.10
PC3: PC3.1 U3.11
PC4: J6.2 R20.1 U5.2
PC5: PC5.1 U3.25
PC6: PC6.1 U3.37
PC7: PC7.1 U3.38
PC8: C30.1 J6.3 U5.3 Y4.2
PC9: C31.1 J6.4 U5.4 Y4.1
PC10: PC4.1 U5.8
PC11: PC8.1 U5.9
PC12: PC9.1 U5.10
PC13: J1.2 R3.1 U3.2
PC14: C2.1 J1.3 U3.3 Y1.2
PC15: C3.1 J1.4 U3.4 Y1.1
PC16: PC10.1 U5.11
PC17: PC11.1 U5.25
PC18: PC12.1 U5.38
PC19: PC13.1 U5.37
PC20: J11.2 R33.1 U9.2
PC21: C47.1 J11.3 U9.3 Y6.2
PC22: C48.1 J11.4 U9.4 Y6.1
PC23: PC14.1 U9.8
PC24: PC15.1 U9.9
PC25: PC16.1 U9.10
PC26: PC17.1 U9.11
PC27: PC18.1 U9.25
PC28: PC19.1 U9.38
PC29: PC20.1 U9.37
PC30: J16.2 R46.1 U13.2
PC31: C64.1 J16.3 U13.3 Y8.2
PC32: C65.1 J16.4 U13.4 Y8.1
PC33: PC21.1 U13.8
PC34: PC22.1 U13.9
PC35: PC23.1 U13.10
PC36: PC24.1 U13.11
PC37: PC25.1 U13.25
PC38: PC26.1 U13.38
PC39: PC27.1 U13.37
PC40: J21.2 R59.1 U17.2
PC41: C81.1 J21.3 U17.3 Y10.2
PC42: C82.1 J21.4 U17.4 Y10.1
PC43: PC28.1 U17.8
PC44: PC29.1 U17.9
PC45: PC30.1 U17.10
PC46: PC31.1 U17.11
PC47: PC32.1 U17.25
PC48: PC33.1 U17.38
PC49: PC34.1 U17.37
R1: R21.2 S4.3
R2: R34.2 S6.3
R3: R47.2 S8.3
R4: R60.2 S10.3
R6: R6.2 S2.3
SDIO_CK: J4.P5 U3.53
SDIO_CK1: J10.P5 U5.53
SDIO_CK2: J15.P5 U9.53
SDIO_CK3: J20.P5 U13.53
SDIO_CK4: J25.P5 U17.53
SDIO_CMD: J4.P3 U3.54
SDIO_CMD1: J10.P3 U5.54
SDIO_CMD2: J15.P3 U9.54
SDIO_CMD3: J20.P3 U13.54
SDIO_CMD4: J25.P3 U17.54
SDIO_D0: J4.P7 U3.39
SDIO_D1: J4.P8 U3.40
SDIO_D2: J4.P1 U3.51
SDIO_D3: J4.P2 R12.1 U3.52
SDIO_D4: J10.P2 R26.1 U5.52
SDIO_D5: J10.P1 U5.51
SDIO_D6: J10.P8 U5.40
SDIO_D7: J10.P7 U5.39
SDIO_D8: J15.P2 R39.1 U9.52
SDIO_D9: J15.P1 U9.51
SDIO_D10: J15.P8 U9.40
SDIO_D11: J15.P7 U9.39
SDIO_D12: J20.P2 R52.1 U13.52
SDIO_D13: J20.P1 U13.51
SDIO_D14: J20.P8 U13.40
SDIO_D15: J20.P7 U13.39
SDIO_D16: J25.P2 R65.1 U17.52
SDIO_D17: J25.P1 U17.51
SDIO_D18: J25.P8 U17.40
SDIO_D19: J25.P7 U17.39
VBAT: J1.1 U3.1
VBAT1: J6.1 U5.1
VBAT2: J11.1 U9.1
VBAT3: J16.1 U13.1
VBAT4: J21.1 U17.1
VBUS: J5.1 Q1.2 U4.1
VBUS1: J9.1 Q2.2 U7.1
VBUS2: J14.1 Q3.2 U11.1
VBUS3: J19.1 Q4.2 U15.1
VBUS4: J24.1 Q5.2 U19.1
VBUS_EN: R7.1 U3.24 U4.4
VBUS_EN1: R24.1 U5.24 U7.4
VBUS_EN2: R37.1 U9.24 U11.4
VBUS_EN3: R50.1 U13.24 U15.4
VBUS_EN4: R63.1 U17.24 U19.4
VCAP_1: C11.2 U3.31
VCAP_2: C14.2 U3.47
VCAP_3: C24.2 U5.31
VCAP_4: C22.2 U5.47
VCAP_5: C41.2 U9.31
VCAP_6: C39.2 U9.47
VCAP_7: C58.2 U13.31
VCAP_8: C56.2 U13.47
VCAP_9: C75.2 U17.31
VCAP_10: C73.2 U17.47

## Tracks (layer width: path | path; a pad name or v marks a point on that pad's centre or on a via)
+3V1  (via drill 0.3)
  Top 0.152: 27.58,42.11 27.73,41.95 29.51,41.95 30.65,43.1 R21.1 31.24,43.02 34.59,43.02 34.74,43.17 34.74,43.94 34.44,44.24 34.44,44.85 D4.2 | J8.4 39.29,45.71 D3.2 39.62,44.55 S3.3
  Top 0.305: 40.94,20.24 40.62,20.55 U5.48 | U5.19 31.88,29.47 32.18,29.76 | U5.32 31.12,22.91 31.03,22.81 | 42.59,30.68 42.59,30.47 U5.64
  Top 0.406: 40.94,20.24 41.83,20.24 42.21,19.86 | C33.1 40.28,10.84 U6.3
  Top 0.457: 43.28,19.09 42.9,19.48 C20.1 42.34,19.73 42.21,19.86 | 43.28,19.09 43.28,17.57 42.67,16.96 42.36,16.96 R26.2 42.21,16.81 42.21,14.68 | 42.21,14.68 42.21,11.47 41.6,10.87 41.34,10.87 C33.1 | 40.28,10.84 40.08,10.64 40.08,9.95 39.92,9.8 39.9,9.8 R22.1 | 42.21,14.68 42.18,14.65 C34.2 40.56,14.65 v40.53,14.68 | 43.28,19.09 45.41,19.09 46.17,19.86 46.17,34.34 | 46.17,34.34 46.17,45.92 44.95,47.14 43.2,47.14 C27.2 41.27,46.53 J8.4 38.22,49.58 28.19,49.58 27.58,48.97 27.58,42.11 27.58,36.8 | J6.18 28.8,7.67 27.58,8.88 27.58,19.09 | 27.58,19.09 27.58,36.8 | 27.58,19.09 30.17,19.09 30.55,19.48 C23.1 31.03,19.6 31.03,22.81 | 30.63,36.8 27.58,36.8 | 46.17,34.34 43.89,34.34 43.5,33.95 C21.2 42.59,30.68 | 30.63,36.8 30.63,37.08 30.93,37.38 31.39,37.38 | 31.39,37.38 33.37,37.38 | 33.37,37.38 34.28,37.38 34.66,37.76 C26.1 | U8.3 31.35,37.42 31.39,37.38 | U8.1 33.25,37.5 33.37,37.38 | 30.63,36.8 30.63,36.01 31.16,35.48 31.16,35.35 L2.1 31.16,35.1 C19.2 31.16,31.92 32.18,30.91 32.18,29.76
  Bottom 0.457: v40.53,14.68 39.01,14.68 36.79,16.89 J10.P4
+3V2  (via drill 0.3)
  Top 0.152: 52.98,42.11 53.13,41.95 54.91,41.95 56.05,43.1 R34.1 56.64,43.02 59.99,43.02 60.14,43.17 60.14,43.94 59.84,44.24 59.84,44.85 D6.2 | J13.4 64.69,45.71 D5.2 65.02,44.55 S5.3
  Top 0.305: 66.34,20.24 66.03,20.55 U9.48 | U9.19 57.28,29.47 57.58,29.76 | U9.32 56.52,22.91 56.43,22.81 | 67.99,30.68 67.99,30.47 U9.64
  Top 0.406: 66.34,20.24 67.23,20.24 67.61,19.86 | C50.1 65.68,10.84 U10.3
  Top 0.457: 68.68,19.09 68.3,19.48 C37.1 67.74,19.73 67.61,19.86 | 68.68,19.09 68.68,17.57 68.07,16.96 67.76,16.96 R39.2 67.61,16.81 67.61,14.68 | 67.61,14.68 67.61,11.47 67,10.87 66.75,10.87 C50.1 | 65.68,10.84 65.48,10.64 65.48,9.95 65.32,9.8 65.3,9.8 R35.1 | 67.61,14.68 67.58,14.65 C51.2 65.96,14.65 v65.93,14.68 | 68.68,19.09 70.81,19.09 71.57,19.86 71.57,34.34 | 71.57,34.34 71.57,45.92 70.35,47.14 68.6,47.14 C44.2 66.67,46.53 J13.4 63.62,49.58 53.59,49.58 52.98,48.97 52.98,42.11 52.98,36.8 | J11.18 54.2,7.67 52.98,8.88 52.98,19.09 | 52.98,19.09 52.98,36.8 | 52.98,19.09 55.57,19.09 55.95,19.48 C40.1 56.43,19.6 56.43,22.81 | 56.03,36.8 52.98,36.8 | 71.57,34.34 69.28,34.34 68.9,33.95 C38.2 67.99,30.68 | 56.03,36.8 56.03,37.08 56.33,37.38 56.79,37.38 | 56.79,37.38 58.77,37.38 | 58.77,37.38 59.68,37.38 60.07,37.76 C43.1 | U12.3 56.75,37.42 56.79,37.38 | U12.1 58.65,37.5 58.77,37.38 | 56.03,36.8 56.03,36.01 56.56,35.48 56.56,35.35 L3.1 56.56,35.1 C36.2 56.56,31.92 57.58,30.91 57.58,29.76
  Bottom 0.457: v65.93,14.68 64.41,14.68 62.19,16.89 J15.P4
+3V3  (via drill 0.3)
  Top 0.152: 2.18,42.11 2.33,41.95 4.11,41.95 5.25,43.1 R6.1 5.84,43.02 9.19,43.02 9.34,43.17 9.34,43.94 9.04,44.24 9.04,44.85 D2.2 | J3.4 13.89,45.71 D1.2 14.22,44.55 S1.3
  Top 0.305: 15.54,20.24 15.22,20.55 U3.48 | U3.19 6.48,29.47 6.78,29.76 | U3.32 5.72,22.91 5.63,22.81 | 17.19,30.68 17.19,30.47 U3.64
  Top 0.406: 15.54,20.24 16.43,20.24 16.81,19.86 | C8.1 14.88,10.84 U1.3
  Top 0.457: 17.88,19.09 17.49,19.48 C13.1 16.94,19.73 16.81,19.86 | 17.88,19.09 17.88,17.57 17.27,16.96 16.96,16.96 R12.2 16.81,16.81 16.81,14.68 | 16.81,14.68 16.81,11.47 16.2,10.87 15.95,10.87 C8.1 | 14.88,10.84 14.68,10.64 14.68,9.95 14.52,9.8 14.5,9.8 R8.1 | 16.81,14.68 16.78,14.65 C16.2 15.16,14.65 v15.13,14.68 | 17.88,19.09 20.01,19.09 20.77,19.86 20.77,34.34 | 20.77,34.34 20.77,45.92 19.55,47.14 17.8,47.14 C17.2 15.87,46.53 J3.4 12.82,49.58 2.79,49.58 2.18,48.97 2.18,42.11 2.18,36.8 | J1.18 3.4,7.67 2.18,8.88 2.18,19.09 | 2.18,19.09 2.18,36.8 | 2.18,19.09 4.77,19.09 5.15,19.48 C12.1 5.63,19.6 5.63,22.81 | 5.23,36.8 2.18,36.8 | 20.77,34.34 18.48,34.34 18.1,33.95 C9.2 17.19,30.68 | 5.23,36.8 5.23,37.08 5.53,37.38 5.99,37.38 | 5.99,37.38 7.97,37.38 | 7.97,37.38 8.88,37.38 9.27,37.76 C1.1 | U2.3 5.95,37.42 5.99,37.38 | U2.1 7.85,37.5 7.97,37.38 | 5.23,36.8 5.23,36.01 5.76,35.48 5.76,35.35 L1.1 5.76,35.1 C10.2 5.76,31.92 6.78,30.91 6.78,29.76
  Bottom 0.457: v15.13,14.68 13.61,14.68 11.39,16.89 J4.P4
+3V3A  (via drill 0.3)
  Top 0.305: 8.94,33.52 9.22,33.23 U3.13
  Top 0.406: C7.2 8.55,33.95 7.67,34.84
  Top 0.457: 7.16,36.44 v7.13,36.47 | 7.21,36.47 7.13,36.39 7.67,36.39 7.67,35.71 | v7.13,35.71 7.67,35.71 | 7.67,35.71 7.67,35.1
  Bottom 0.457: v7.13,35.71 v7.13,36.47 7.05,36.55 7.05,36.77 5.38,38.45 5.38,41.04 4.46,41.95 2.97,41.95 2.2,42.72 2.2,48.99 2.79,49.58 17.83,49.58 J2.1
  pour Top (rank 2, no thermals): 9.34,31.9 9.34,34.18 8.43,34.18 8.12,34.49 8.12,36.93 6.45,36.93 6.45,35.55 7.51,34.34 7.51,33.12 8.73,33.12 8.73,31.9
+3V3A1  (via drill 0.3)
  Top 0.305: 34.34,33.52 34.62,33.23 U5.13
  Top 0.406: C25.2 33.95,33.95 33.07,34.84
  Top 0.457: 32.56,36.44 v32.53,36.47 | 32.61,36.47 32.53,36.39 33.07,36.39 33.07,35.71 | v32.53,35.71 33.07,35.71 | 33.07,35.71 33.07,35.1
  Bottom 0.457: v32.53,35.71 v32.53,36.47 32.45,36.55 32.45,36.77 30.78,38.45 30.78,41.04 29.87,41.95 28.37,41.95 27.6,42.72 27.6,48.99 28.19,49.58 43.23,49.58 J7.1
  pour Top (rank 2, no thermals): 34.74,31.9 34.74,34.18 33.83,34.18 33.52,34.49 33.52,36.93 31.85,36.93 31.85,35.55 32.91,34.34 32.91,33.12 34.13,33.12 34.13,31.9
+3V3A2  (via drill 0.3)
  Top 0.305: 59.73,33.52 60.02,33.23 U9.13
  Top 0.406: C42.2 59.35,33.95 58.47,34.84
  Top 0.457: 57.96,36.44 v57.93,36.47 | 58.01,36.47 57.93,36.39 58.47,36.39 58.47,35.71 | v57.93,35.71 58.47,35.71 | 58.47,35.71 58.47,35.1
  Bottom 0.457: v57.93,35.71 v57.93,36.47 57.86,36.55 57.86,36.77 56.18,38.45 56.18,41.04 55.27,41.95 53.77,41.95 53,42.72 53,48.99 53.59,49.58 68.62,49.58 J12.1
  pour Top (rank 2, no thermals): 60.14,31.9 60.14,34.18 59.23,34.18 58.92,34.49 58.92,36.93 57.25,36.93 57.25,35.55 58.31,34.34 58.31,33.12 59.53,33.12 59.53,31.9
+3V3A3  (via drill 0.3)
  Top 0.305: 85.14,33.52 85.42,33.23 U13.13
  Top 0.406: C59.2 84.75,33.95 83.86,34.84
  Top 0.457: 83.36,36.44 v83.33,36.47 | 83.41,36.47 83.33,36.39 83.86,36.39 83.86,35.71 | v83.33,35.71 83.86,35.71 | 83.86,35.71 83.86,35.1
  Bottom 0.457: v83.33,35.71 v83.33,36.47 83.25,36.55 83.25,36.77 81.58,38.45 81.58,41.04 80.67,41.95 79.17,41.95 78.4,42.72 78.4,48.99 78.99,49.58 94.03,49.58 J17.1
  pour Top (rank 2, no thermals): 85.54,31.9 85.54,34.18 84.63,34.18 84.32,34.49 84.32,36.93 82.65,36.93 82.65,35.55 83.71,34.34 83.71,33.12 84.93,33.12 84.93,31.9
+3V3A4  (via drill 0.3)
  Top 0.305: 33.52,69.89 33.23,69.61 U17.13
  Top 0.406: C76.2 33.95,70.28 34.84,71.17
  Top 0.457: 36.44,71.67 v36.47,71.7 | 36.47,71.62 36.39,71.7 36.39,71.17 35.71,71.17 | v35.71,71.7 35.71,71.17 | 35.71,71.17 35.1,71.17
  Bottom 0.457: v35.71,71.7 v36.47,71.7 36.55,71.78 36.77,71.78 38.45,73.45 41.04,73.45 41.95,74.36 41.95,75.86 42.72,76.63 48.99,76.63 49.58,76.04 49.58,61.01 J22.1
  pour Top (rank 2, no thermals): 31.9,69.49 34.18,69.49 34.18,70.4 34.49,70.71 36.93,70.71 36.93,72.38 35.55,72.38 34.34,71.32 33.12,71.32 33.12,70.1 31.9,70.1
+3V4  (via drill 0.3)
  Top 0.152: 78.38,42.11 78.53,41.95 80.31,41.95 81.45,43.1 R47.1 82.04,43.02 85.39,43.02 85.54,43.17 85.54,43.94 85.24,44.24 85.24,44.85 D8.2 | J18.4 90.09,45.71 D7.2 90.42,44.55 S7.3
  Top 0.305: 91.74,20.24 91.42,20.55 U13.48 | U13.19 82.68,29.47 82.98,29.76 | U13.32 81.92,22.91 81.83,22.81 | 93.39,30.68 93.39,30.47 U13.64
  Top 0.406: 91.74,20.24 92.63,20.24 93.01,19.86 | C67.1 91.08,10.84 U14.3
  Top 0.457: 94.08,19.09 93.7,19.48 C54.1 93.14,19.73 93.01,19.86 | 94.08,19.09 94.08,17.57 93.47,16.96 93.16,16.96 R52.2 93.01,16.81 93.01,14.68 | 93.01,14.68 93.01,11.47 92.4,10.87 92.14,10.87 C67.1 | 91.08,10.84 90.88,10.64 90.88,9.95 90.72,9.8 90.7,9.8 R48.1 | 93.01,14.68 92.98,14.65 C68.2 91.36,14.65 v91.33,14.68 | 94.08,19.09 96.21,19.09 96.97,19.86 96.97,34.34 | 96.97,34.34 96.97,45.92 95.75,47.14 94,47.14 C61.2 92.07,46.53 J18.4 89.02,49.58 78.99,49.58 78.38,48.97 78.38,42.11 78.38,36.8 | J16.18 79.6,7.67 78.38,8.88 78.38,19.09 | 78.38,19.09 78.38,36.8 | 78.38,19.09 80.97,19.09 81.35,19.48 C57.1 81.83,19.6 81.83,22.81 | 81.43,36.8 78.38,36.8 | 96.97,34.34 94.69,34.34 94.3,33.95 C55.2 93.39,30.68 | 81.43,36.8 81.43,37.08 81.73,37.38 82.19,37.38 | 82.19,37.38 84.17,37.38 | 84.17,37.38 85.08,37.38 85.47,37.76 C60.1 | U16.3 82.15,37.42 82.19,37.38 | U16.1 84.05,37.5 84.17,37.38 | 81.43,36.8 81.43,36.01 81.96,35.48 81.96,35.35 L4.1 81.96,35.1 C53.2 81.96,31.92 82.98,30.91 82.98,29.76
  Bottom 0.457: v91.33,14.68 89.81,14.68 87.59,16.89 J20.P4
+3V5  (via drill 0.3)
  Top 0.152: 42.11,76.65 41.95,76.5 41.95,74.72 43.1,73.58 R60.1 43.02,72.99 43.02,69.64 43.17,69.49 43.94,69.49 44.24,69.79 44.85,69.79 D10.2 | J23.4 45.71,64.94 D9.2 44.55,64.61 S9.3
  Top 0.305: 20.24,63.29 20.55,63.61 U17.48 | U17.19 29.47,72.35 29.76,72.05 | U17.32 22.91,73.11 22.81,73.2 | 30.68,61.64 30.47,61.64 U17.64
  Top 0.406: 20.24,63.29 20.24,62.4 19.86,62.02 | C84.1 10.84,63.95 U18.3
  Top 0.457: 19.09,60.95 19.48,61.34 C71.1 19.73,61.89 19.86,62.02 | 19.09,60.95 17.57,60.95 16.96,61.56 16.96,61.87 R65.2 16.81,62.02 14.68,62.02 | 14.68,62.02 11.47,62.02 10.87,62.63 10.87,62.89 C84.1 | 10.84,63.95 10.64,64.16 9.95,64.16 9.8,64.31 9.8,64.33 R61.1 | 14.68,62.02 14.65,62.05 C85.2 14.65,63.67 v14.68,63.7 | 19.09,60.95 19.09,58.82 19.86,58.06 34.34,58.06 | 34.34,58.06 45.92,58.06 47.14,59.28 47.14,61.03 C78.2 46.53,62.96 J23.4 49.58,66.01 49.58,76.04 48.97,76.65 42.11,76.65 36.8,76.65 | J21.18 7.67,75.43 8.88,76.65 19.09,76.65 | 19.09,76.65 36.8,76.65 | 19.09,76.65 19.09,74.06 19.48,73.68 C74.1 19.6,73.2 22.81,73.2 | 36.8,73.6 36.8,76.65 | 34.34,58.06 34.34,60.34 33.95,60.73 C72.2 30.68,61.64 | 36.8,73.6 37.08,73.6 37.38,73.3 37.38,72.84 | 37.38,72.84 37.38,70.86 | 37.38,70.86 37.38,69.95 37.76,69.56 C77.1 | U20.3 37.42,72.88 37.38,72.84 | U20.1 37.5,70.98 37.38,70.86 | 36.8,73.6 36.01,73.6 35.48,73.07 35.35,73.07 L5.1 35.1,73.07 C70.2 31.92,73.07 30.91,72.05 29.76,72.05
  Bottom 0.457: v14.68,63.7 14.68,65.22 16.89,67.44 J25.P4
+5V  (via drill 0.3)
  Top 0.406: 6.59,8.3 Q1.3
  Top 0.457: U1.1 9.67,10.59 9.19,10.1 9.19,9.7 C6.1 8.99,9.49 8.02,9.49 | U4.5 7.82,11.76 7.82,11.47 8.02,11.27 v8.02,10.76 v8.02,10 8.02,9.49 | 8.02,9.49 8.02,9.24 7.15,8.37 Q1.3
  Bottom 0.457: J2.3 20.77,44.09 20.77,9.49 20.16,8.88 17.42,8.88 15.44,6.9 12.39,6.9 9.49,9.8 8.22,9.8 v8.02,10 v8.02,10.76
+5V1  (via drill 0.3)
  Top 0.406: 31.99,8.3 Q2.3
  Top 0.457: U6.1 35.07,10.59 34.59,10.1 34.59,9.7 C32.1 34.39,9.49 33.42,9.49 | U7.5 33.22,11.76 33.22,11.47 33.42,11.27 v33.42,10.76 v33.42,10 33.42,9.49 | 33.42,9.49 33.42,9.24 32.55,8.37 Q2.3
  Bottom 0.457: J7.3 46.17,44.09 46.17,9.49 45.56,8.88 42.82,8.88 40.84,6.9 37.79,6.9 34.89,9.8 33.62,9.8 v33.42,10 v33.42,10.76
+5V2  (via drill 0.3)
  Top 0.406: 57.39,8.3 Q3.3
  Top 0.457: U10.1 60.47,10.59 59.99,10.1 59.99,9.7 C49.1 59.79,9.49 58.82,9.49 | U11.5 58.62,11.76 58.62,11.47 58.82,11.27 v58.82,10.76 v58.82,10 58.82,9.49 | 58.82,9.49 58.82,9.24 57.95,8.37 Q3.3
  Bottom 0.457: J12.3 71.57,44.09 71.57,9.49 70.96,8.88 68.22,8.88 66.24,6.9 63.19,6.9 60.29,9.8 59.02,9.8 v58.82,10 v58.82,10.76
+5V3  (via drill 0.3)
  Top 0.406: 82.79,8.3 Q4.3
  Top 0.457: U14.1 85.87,10.59 85.39,10.1 85.39,9.7 C66.1 85.19,9.49 84.22,9.49 | U15.5 84.02,11.76 84.02,11.47 84.22,11.27 v84.22,10.76 v84.22,10 84.22,9.49 | 84.22,9.49 84.22,9.24 83.35,8.37 Q4.3
  Bottom 0.457: J17.3 96.97,44.09 96.97,9.49 96.36,8.88 93.62,8.88 91.64,6.9 88.59,6.9 85.69,9.8 84.42,9.8 v84.22,10 v84.22,10.76
+5V4  (via drill 0.3)
  Top 0.406: 8.3,72.24 Q5.3
  Top 0.457: U18.1 10.59,69.16 10.1,69.64 9.7,69.64 C83.1 9.49,69.84 9.49,70.81 | U19.5 11.76,71.01 11.47,71.01 11.27,70.81 v10.76,70.81 v10,70.81 9.49,70.81 | 9.49,70.81 9.24,70.81 8.37,71.68 Q5.3
  Bottom 0.457: J22.3 44.09,58.06 9.49,58.06 8.88,58.67 8.88,61.41 6.9,63.39 6.9,66.44 9.8,69.34 9.8,70.61 v10,70.81 v10.76,70.81
AGND
  Top 0.305: U3.12 9.72,33.2 9.95,33.42 9.95,34.34 C7.1
  pour Top (no thermals): 9.8,31.9 9.8,32.96 10.1,33.27 10.1,34.49 9.49,35.1 9.49,36.77 8.27,36.77 8.27,34.79 8.58,34.49 9.65,34.49 9.65,31.9
AGND1
  Top 0.305: U5.12 35.12,33.2 35.35,33.42 35.35,34.34 C25.1
  pour Top (no thermals): 35.2,31.9 35.2,32.96 35.5,33.27 35.5,34.49 34.89,35.1 34.89,36.77 33.67,36.77 33.67,34.79 33.98,34.49 35.05,34.49 35.05,31.9
AGND2
  Top 0.305: U9.12 60.52,33.2 60.75,33.42 60.75,34.34 C42.1
  pour Top (no thermals): 60.6,31.9 60.6,32.96 60.9,33.27 60.9,34.49 60.29,35.1 60.29,36.77 59.07,36.77 59.07,34.79 59.38,34.49 60.45,34.49 60.45,31.9
AGND3
  Top 0.305: U13.12 85.92,33.2 86.15,33.42 86.15,34.34 C59.1
  pour Top (no thermals): 86,31.9 86,32.96 86.3,33.27 86.3,34.49 85.69,35.1 85.69,36.77 84.47,36.77 84.47,34.79 84.78,34.49 85.85,34.49 85.85,31.9
AGND4
  Top 0.305: U17.12 33.2,69.11 33.42,68.88 34.34,68.88 C76.1
  pour Top (no thermals): 31.9,69.03 32.96,69.03 33.27,68.73 34.49,68.73 35.1,69.34 36.77,69.34 36.77,70.56 34.79,70.56 34.49,70.25 34.49,69.18 31.9,69.18
BOOT0  (via drill 0.3)
  Top 0.152: U3.60 17.2,28.49 16.4,28.49 16.35,28.54 15.63,28.54 | 15.63,28.54 15.59,28.54 v15.29,28.85 | v18.03,37.08 18.03,37.54 | 18.03,37.54 18.03,39.67 | 18.03,39.67 18.03,40.43 17.57,40.89 17.57,41.07 R5.2 | 15.89,39.21 14.37,39.21 13.94,38.78 R4.1 | 15.89,39.21 16.2,39.21 16.66,39.67 18.03,39.67 | S1.2 15.84,39.26 15.89,39.21 | 15.63,28.54 15.5,28.92 v15.29,28.85 | 15.63,28.54 15.24,28.62 v15.29,28.85 | 18.03,37.54 17.83,37.19 v18.03,37.08 | 18.03,37.54 18.23,37.19 v18.03,37.08
  Bottom 0.152: v15.29,28.85 15.59,28.54 15.63,28.54 | 15.63,28.54 15.89,28.54 17.11,29.76 17.11,31.44 17.42,31.74 17.42,33.73 17.72,34.03 17.72,36.16 18.03,36.47 18.03,36.62 | 18.03,36.62 v18.03,37.08 | 15.63,28.54 15.5,28.92 v15.29,28.85 | 15.63,28.54 15.24,28.62 v15.29,28.85 | 18.03,36.62 18.23,36.96 v18.03,37.08 | 18.03,36.62 17.83,36.96 v18.03,37.08
BOOT1  (via drill 0.3)
  Top 0.152: U5.60 42.6,28.49 41.8,28.49 41.75,28.54 41.03,28.54 | 41.03,28.54 40.99,28.54 v40.69,28.85 | v43.43,37.08 43.43,37.54 | 43.43,37.54 43.43,39.67 | 43.43,39.67 43.43,40.43 42.97,40.89 42.97,41.07 R23.2 | 41.3,39.21 39.77,39.21 39.34,38.78 R15.1 | 41.3,39.21 41.6,39.21 42.06,39.67 43.43,39.67 | S3.2 41.24,39.26 41.3,39.21 | 41.03,28.54 40.9,28.92 v40.69,28.85 | 41.03,28.54 40.64,28.62 v40.69,28.85 | 43.43,37.54 43.23,37.19 v43.43,37.08 | 43.43,37.54 43.63,37.19 v43.43,37.08
  Bottom 0.152: v40.69,28.85 40.99,28.54 41.03,28.54 | 41.03,28.54 41.3,28.54 42.51,29.76 42.51,31.44 42.82,31.74 42.82,33.73 43.12,34.03 43.12,36.16 43.43,36.47 43.43,36.62 | 43.43,36.62 v43.43,37.08 | 41.03,28.54 40.9,28.92 v40.69,28.85 | 41.03,28.54 40.64,28.62 v40.69,28.85 | 43.43,36.62 43.63,36.96 v43.43,37.08 | 43.43,36.62 43.23,36.96 v43.43,37.08
BOOT2  (via drill 0.3)
  Top 0.152: U9.60 68,28.49 67.2,28.49 67.15,28.54 66.43,28.54 | 66.43,28.54 66.39,28.54 v66.09,28.85 | v68.83,37.08 68.83,37.54 | 68.83,37.54 68.83,39.67 | 68.83,39.67 68.83,40.43 68.37,40.89 68.37,41.07 R36.2 | 66.7,39.21 65.17,39.21 64.74,38.78 R28.1 | 66.7,39.21 67,39.21 67.46,39.67 68.83,39.67 | S5.2 66.64,39.26 66.7,39.21 | 66.43,28.54 66.3,28.92 v66.09,28.85 | 66.43,28.54 66.04,28.62 v66.09,28.85 | 68.83,37.54 68.63,37.19 v68.83,37.08 | 68.83,37.54 69.03,37.19 v68.83,37.08
  Bottom 0.152: v66.09,28.85 66.39,28.54 66.43,28.54 | 66.43,28.54 66.7,28.54 67.91,29.76 67.91,31.44 68.22,31.74 68.22,33.73 68.52,34.03 68.52,36.16 68.83,36.47 68.83,36.62 | 68.83,36.62 v68.83,37.08 | 66.43,28.54 66.3,28.92 v66.09,28.85 | 66.43,28.54 66.04,28.62 v66.09,28.85 | 68.83,36.62 69.03,36.96 v68.83,37.08 | 68.83,36.62 68.63,36.96 v68.83,37.08
BOOT3  (via drill 0.3)
  Top 0.152: U13.60 93.4,28.49 92.6,28.49 92.55,28.54 91.83,28.54 | 91.83,28.54 91.79,28.54 v91.48,28.85 | v94.23,37.08 94.23,37.54 | 94.23,37.54 94.23,39.67 | 94.23,39.67 94.23,40.43 93.77,40.89 93.77,41.07 R49.2 | 92.09,39.21 90.57,39.21 90.14,38.78 R41.1 | 92.09,39.21 92.4,39.21 92.86,39.67 94.23,39.67 | S7.2 92.04,39.26 92.09,39.21 | 91.83,28.54 91.7,28.92 v91.48,28.85 | 91.83,28.54 91.44,28.62 v91.48,28.85 | 94.23,37.54 94.03,37.19 v94.23,37.08 | 94.23,37.54 94.43,37.19 v94.23,37.08
  Bottom 0.152: v91.48,28.85 91.79,28.54 91.83,28.54 | 91.83,28.54 92.09,28.54 93.31,29.76 93.31,31.44 93.62,31.74 93.62,33.73 93.92,34.03 93.92,36.16 94.23,36.47 94.23,36.62 | 94.23,36.62 v94.23,37.08 | 91.83,28.54 91.7,28.92 v91.48,28.85 | 91.83,28.54 91.44,28.62 v91.48,28.85 | 94.23,36.62 94.43,36.96 v94.23,37.08 | 94.23,36.62 94.03,36.96 v94.23,37.08
BOOT4  (via drill 0.3)
  Top 0.152: U17.60 28.49,61.63 28.49,62.43 28.54,62.48 28.54,63.2 | 28.54,63.2 28.54,63.24 v28.85,63.55 | v37.08,60.8 37.54,60.8 | 37.54,60.8 39.67,60.8 | 39.67,60.8 40.43,60.8 40.89,61.26 41.07,61.26 R62.2 | 39.21,62.94 39.21,64.46 38.78,64.89 R54.1 | 39.21,62.94 39.21,62.63 39.67,62.17 39.67,60.8 | S9.2 39.26,62.99 39.21,62.94 | 28.54,63.2 28.92,63.33 v28.85,63.55 | 28.54,63.2 28.62,63.59 v28.85,63.55 | 37.54,60.8 37.19,61 v37.08,60.8 | 37.54,60.8 37.19,60.6 v37.08,60.8
  Bottom 0.152: v28.85,63.55 28.54,63.24 28.54,63.2 | 28.54,63.2 28.54,62.94 29.76,61.72 31.44,61.72 31.74,61.41 33.73,61.41 34.03,61.11 36.16,61.11 36.47,60.8 36.62,60.8 | 36.62,60.8 v37.08,60.8 | 28.54,63.2 28.92,63.33 v28.85,63.55 | 28.54,63.2 28.62,63.59 v28.85,63.55 | 36.62,60.8 36.96,60.6 v37.08,60.8 | 36.62,60.8 36.96,61 v37.08,60.8
D1
  Top 0.152: D1.1 16.17,44.88 16.81,44.24 16.94,44.24 R2.2
D2
  Top 0.152: D2.1 6.78,44.88 6.14,45.51 5.89,45.51 R3.2
D3
  Top 0.152: D3.1 41.57,44.88 42.21,44.24 42.34,44.24 R19.2
D4
  Top 0.152: D4.1 32.18,44.88 31.54,45.51 31.29,45.51 R20.2
D5
  Top 0.152: D5.1 66.97,44.88 67.61,44.24 67.74,44.24 R32.2
D6
  Top 0.152: D6.1 57.58,44.88 56.94,45.51 56.69,45.51 R33.2
D7
  Top 0.152: D7.1 92.37,44.88 93.01,44.24 93.14,44.24 R45.2
D8
  Top 0.152: D8.1 82.98,44.88 82.34,45.51 82.09,45.51 R46.2
D9
  Top 0.152: D9.1 44.88,62.66 44.24,62.02 44.24,61.89 R58.2
D10
  Top 0.152: D10.1 44.88,72.05 45.51,72.69 45.51,72.94 R59.2
DM
  Top 0.152: J5.2 10.84,6.49 10.84,6.88 11.02,7.05 11.02,7.67 R9.1
DM1
  Top 0.152: J9.2 36.24,6.49 36.24,6.88 36.42,7.05 36.42,7.67 R16.1
DM2
  Top 0.152: J14.2 61.64,6.49 61.64,6.88 61.82,7.05 61.82,7.67 R29.1
DM3
  Top 0.152: J19.2 87.04,6.49 87.04,6.88 87.22,7.05 87.22,7.67 R42.1
DM4
  Top 0.152: J24.2 6.49,67.99 6.88,67.99 7.05,67.81 7.67,67.81 R55.1
DP
  Top 0.152: J5.3 11.47,6.9 11.32,7.05 11.32,7.97 R10.1
DP1
  Top 0.152: J9.3 36.88,6.9 36.72,7.05 36.72,7.97 R17.1
DP2
  Top 0.152: J14.3 62.27,6.9 62.12,7.05 62.12,7.97 R30.1
DP3
  Top 0.152: J19.3 87.67,6.9 87.52,7.05 87.52,7.97 R43.1
DP4
  Top 0.152: J24.3 6.9,67.36 7.05,67.51 7.97,67.51 R56.1
GND  (via drill 0.3)
  Top 0.152: U2.2 6.9,38.91 | S2.6 7.92,43.89 8.28,44.24 8.28,46.5 J3.1 | C4.2 12.52,38.78
  Top 0.457: C6.2 9.06,7.54 v9.04,7.51 | C10.1 7.03,34.21 v6.75,34.49
  Bottom 0.457: v9.04,7.51 8.79,7.51 J4.G2
  other vias: 12.74,43.23 10.21,43.23 14.02,13.71 6.9,38.2 16.2,17.88 11.47,15.29 10.21,15.29 10.21,14.02 16.55,3.85 21.63,1.31 21.63,3.85 21.63,6.39 21.63,8.94 21.63,11.47 21.63,14.02 21.63,16.55 21.63,19.09 21.63,21.63 21.63,24.17 21.63,26.72 21.63,29.26 21.63,31.8 21.63,34.34 21.63,36.88 21.63,39.41 21.63,41.95 21.63,44.5 21.63,47.04 21.63,49.58 21.63,52.12 16.55,52.12 14.02,52.12 11.47,52.12 8.94,52.12 6.39,52.12 1.31,52.12 1.31,49.58 1.31,47.04 1.31,44.5 1.31,41.95 1.31,39.41 1.31,36.88 1.31,34.34 1.31,31.8 1.31,29.26 1.31,26.72 1.31,24.17 1.31,21.63 1.31,19.09 1.31,16.55 1.31,14.02 1.31,11.47 1.31,8.94 1.31,6.39 1.31,3.85 1.31,1.31 6.39,3.85 14.02,29.26 14.02,30.52 15.29,8.43 7.67,41.95 8.94,41.95 10.21,41.95 12.74,41.95 14.02,41.95 15.29,41.95 12.74,44.5 10.21,44.5 5.12,11.47 12.74,14.02 2.84,3.85 3.85,44.5 19.09,3.85 19.09,11.47 19.09,14.02 19.09,16.55 19.09,21.63 19.09,24.17 19.09,26.72 19.09,44.5 20.37,49.58 15.29,50.84 12.74,27.98 11.47,39.41 10.21,45.77 3.85,29.26 3.85,26.72 3.85,24.17 3.85,11.47 3.85,8.94 3.85,6.39 3.85,31.8 3.85,21.63 19.09,29.26 19.09,31.8 19.09,39.41 19.09,6.39 3.85,39.41 3.85,47.04 7.67,15.29
  pour Top (rank 3): 0.04,0.04 0.04,53.39 22.91,53.39 22.91,0.04
  pour Bottom: 0.04,0.04 0.04,53.39 22.91,53.39 22.91,0.04
GND1  (via drill 0.3)
  Top 0.152: U8.2 32.3,38.91 | S4.6 33.32,43.89 33.68,44.24 33.68,46.5 J8.1 | C29.2 37.92,38.78
  Top 0.457: C32.2 34.46,7.54 v34.44,7.51 | C19.1 32.43,34.21 v32.15,34.49
  Bottom 0.457: v34.44,7.51 34.2,7.51 J10.G2